# Altium PCB hdmii_m2m_jumper_v5.PcbDoc
Units mm, origin at the board's own origin, x right, y up, seen from the top; angles counter-clockwise.
Board outline 24.73 x 35.28 mm, 4 copper layers (L1, L2, L3, L4), stack 1.559 mm thick; 6 components, 14 nets, 50 pads, 111 vias.
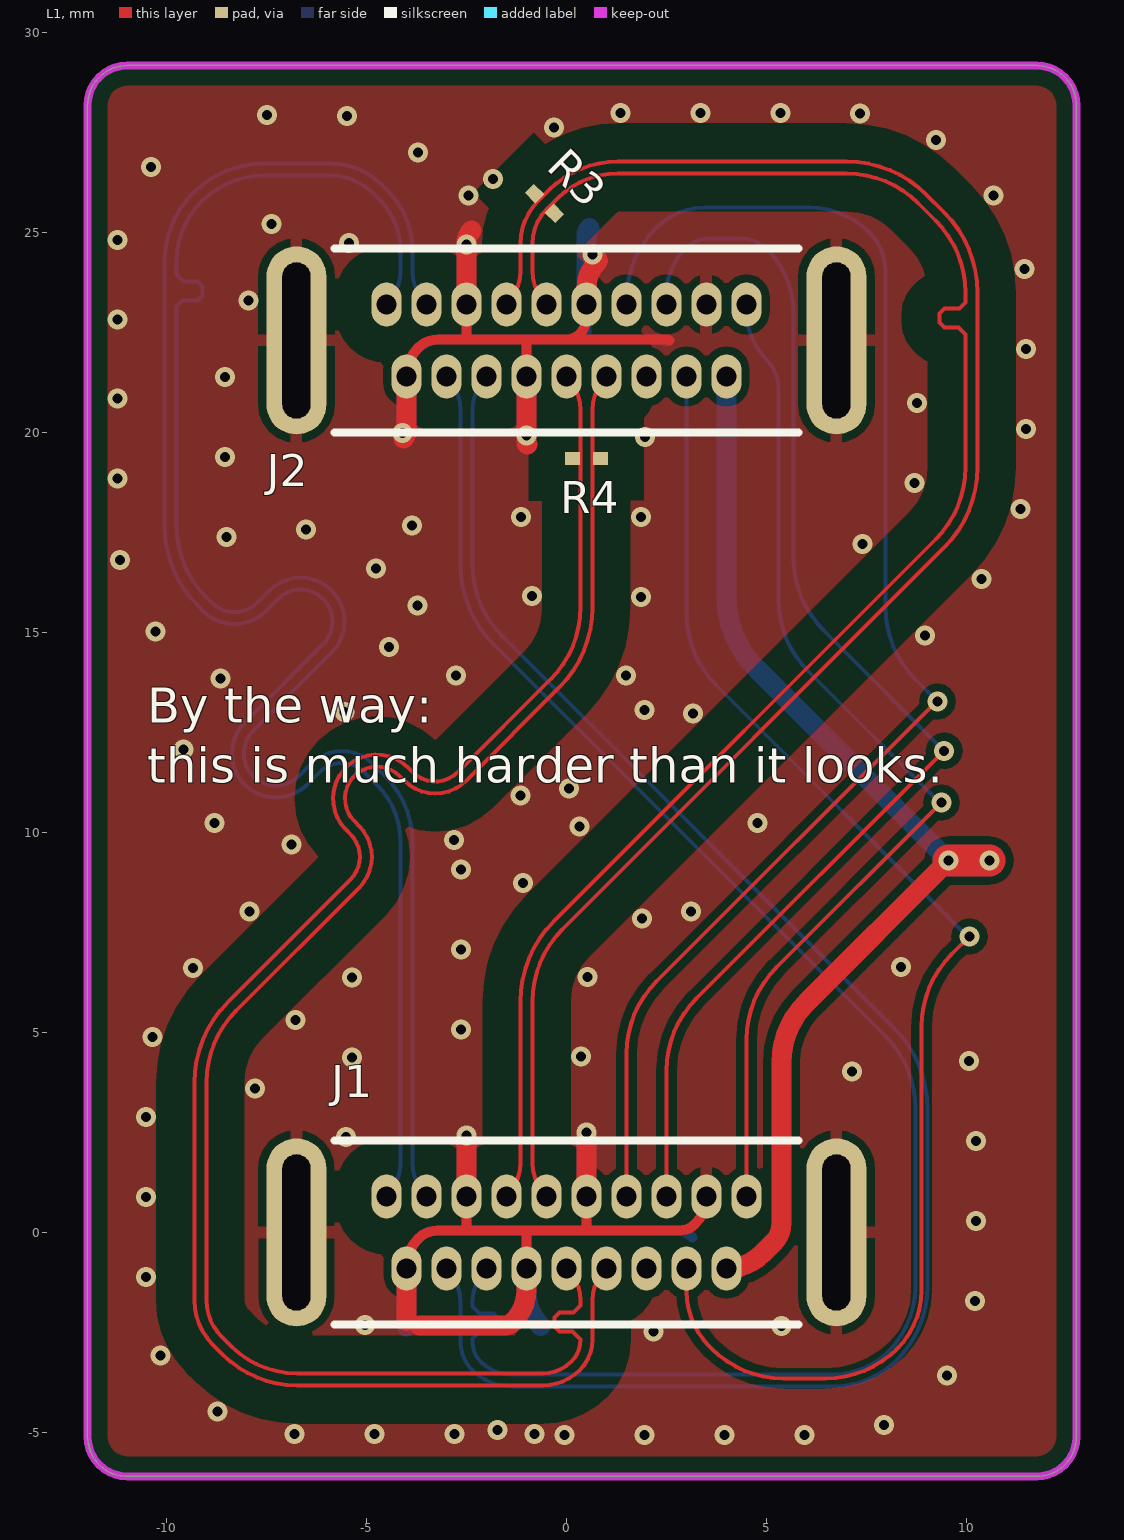
[diagram p0: L1 view]
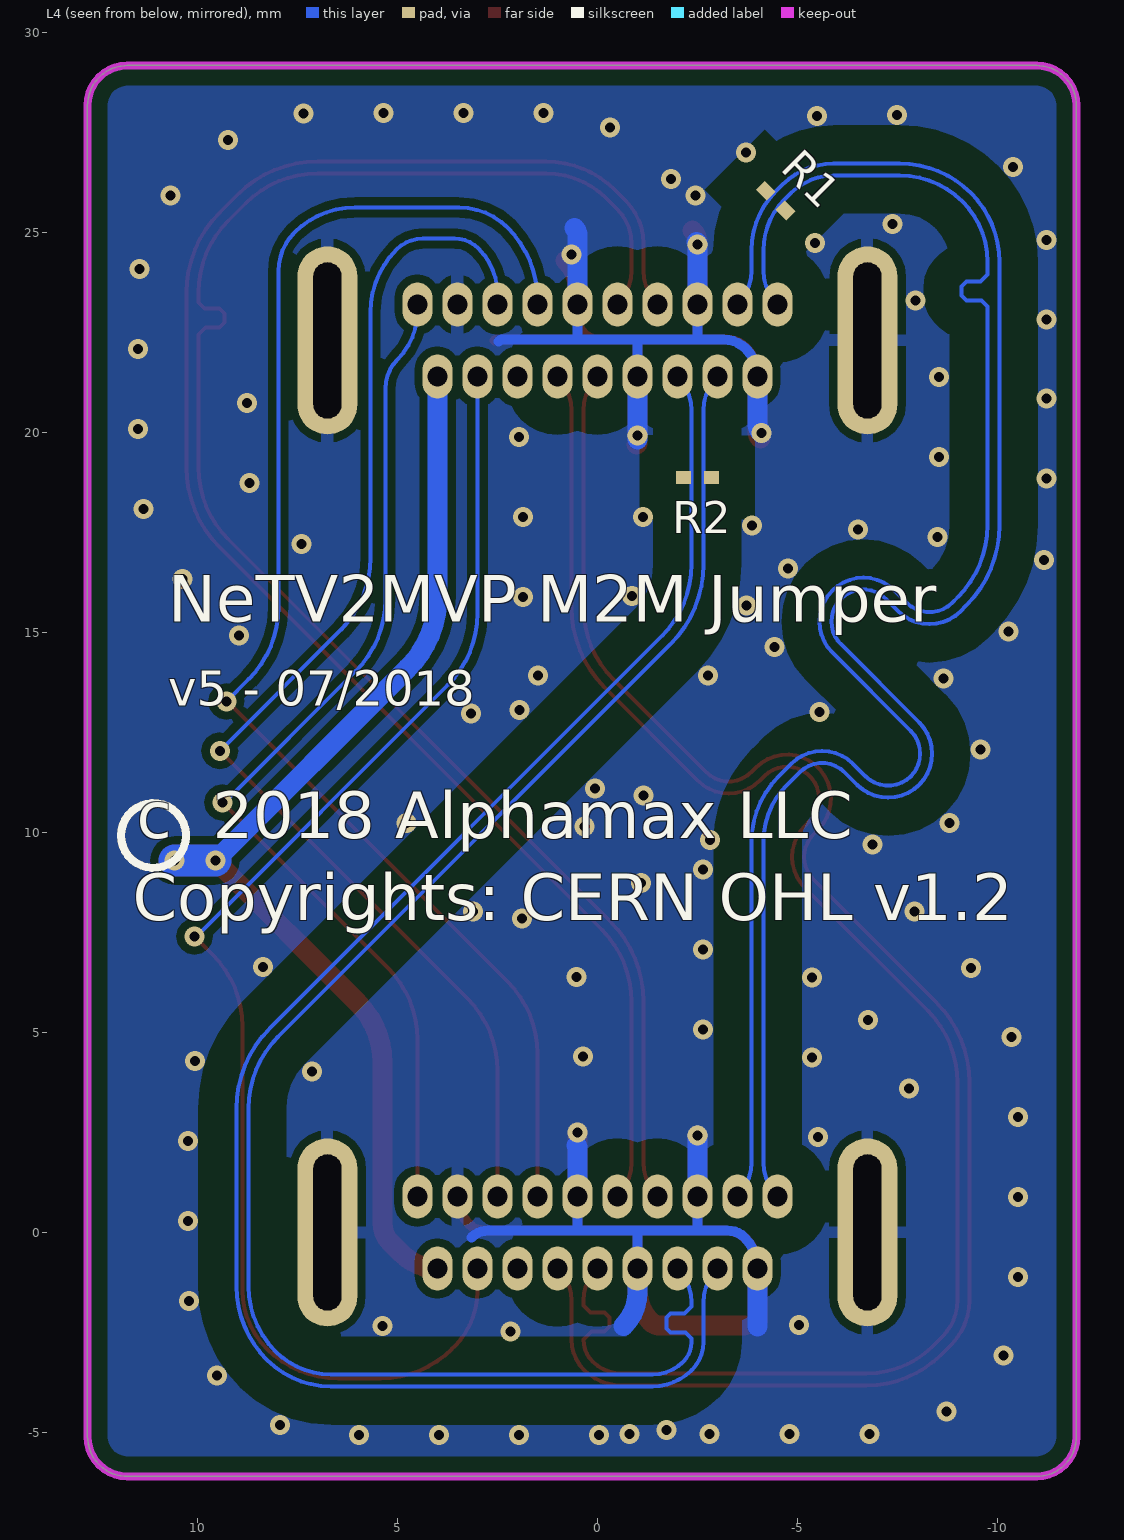
[diagram p1: L4 view, seen from below]
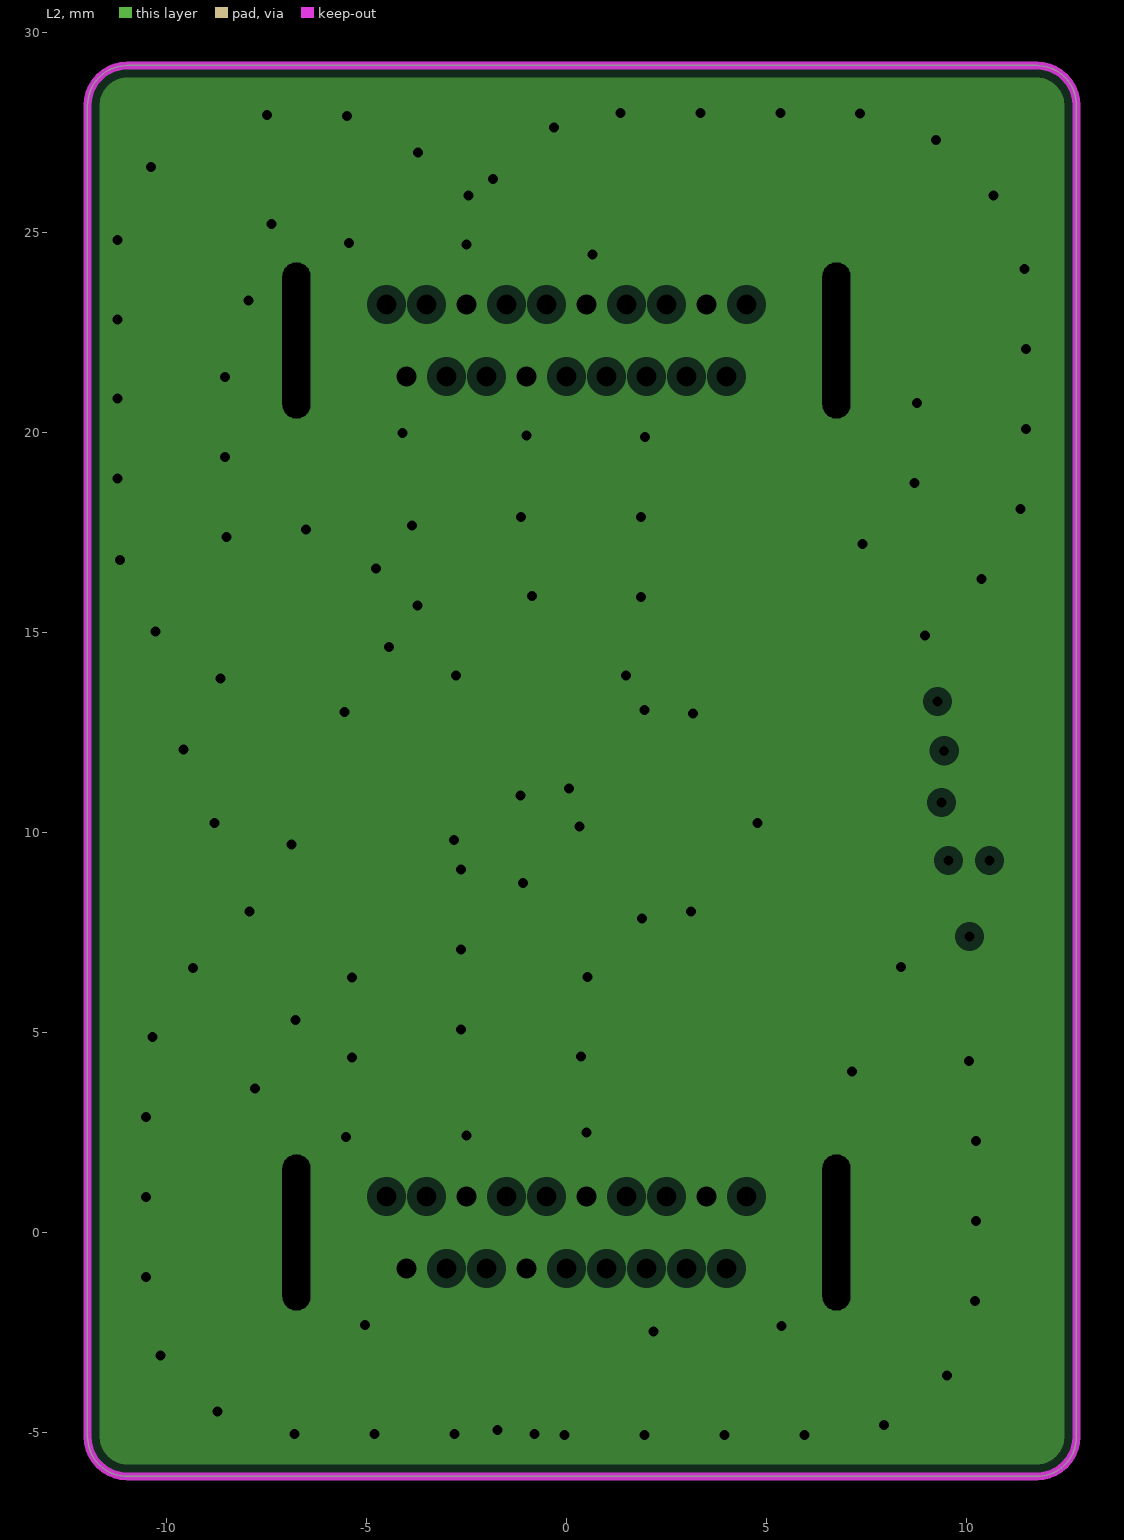
[diagram p2: L2, clearances drawn from the general rule]
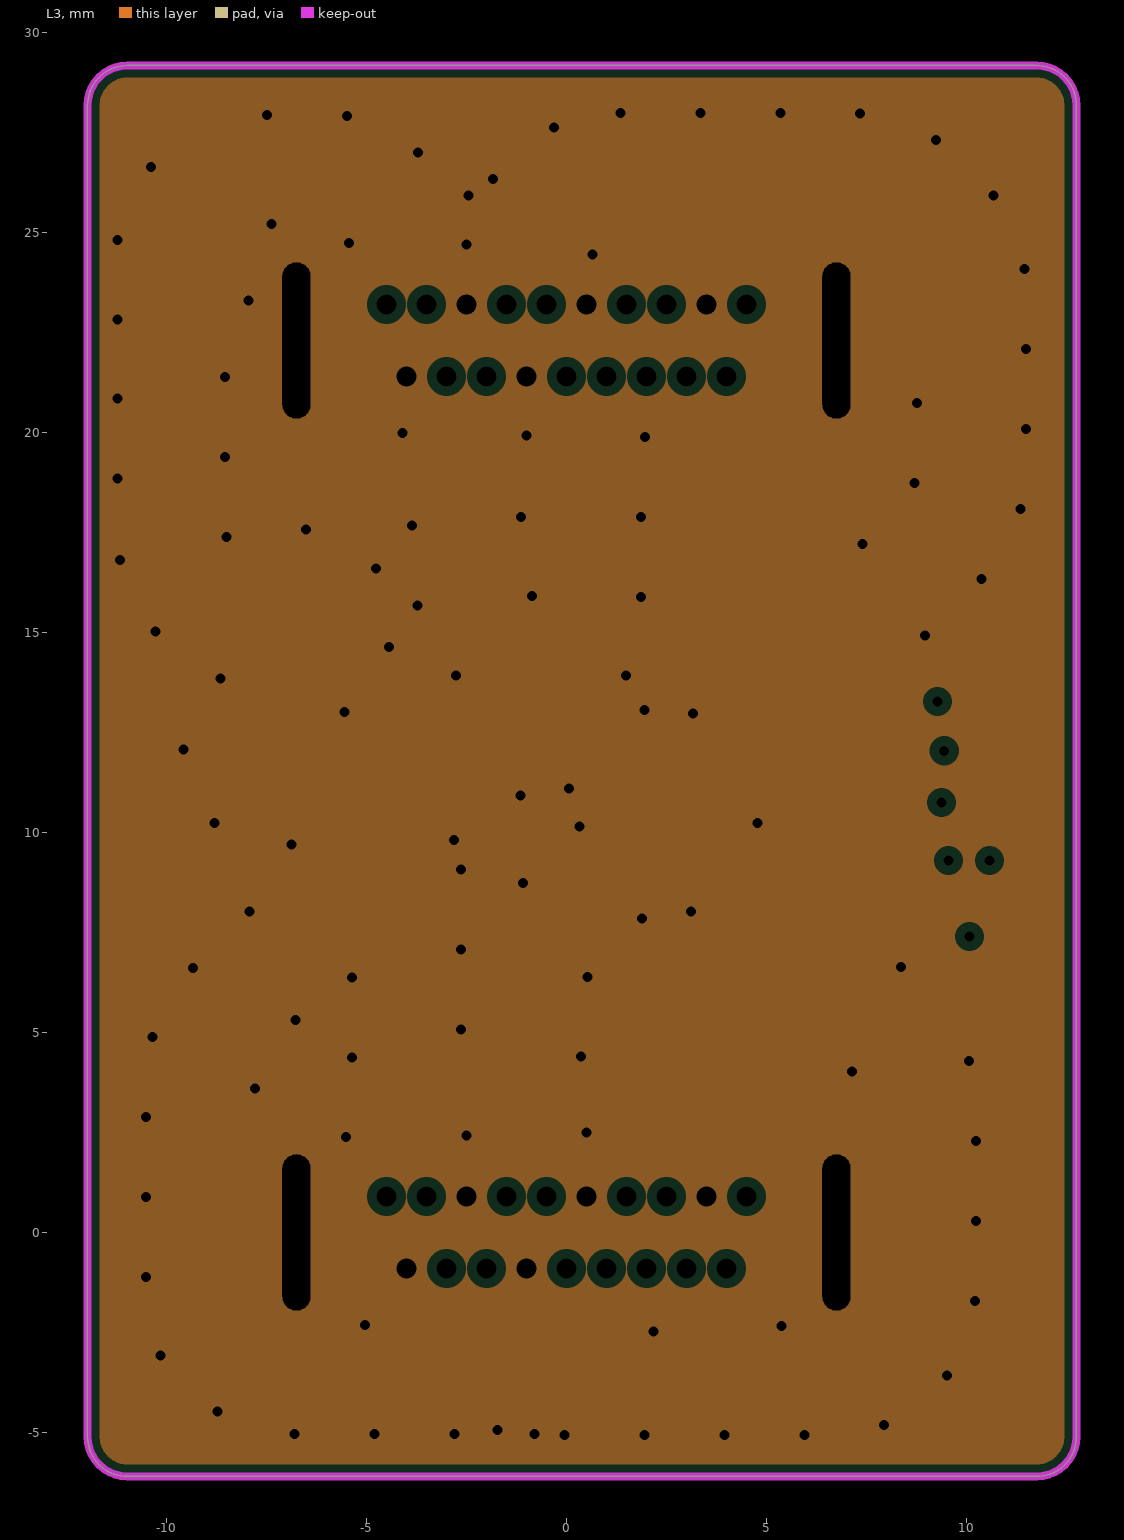
[diagram p3: L3, clearances drawn from the general rule]

## Layer stack, top to bottom
TopSolder: solder mask 0.0102, Solder Resist, Dk 3.6
L1: signal copper 0.0356
Dielectric1: core 0.0762, FR-4, Dk 3.9
L2: plane copper 0.0178, net GND
Dielectric4: prepreg 1.3, FR-4, Dk 4.4
L3: plane copper 0.0178, net GND
Dielectric5: core 0.0762, FR-4, Dk 4.2
L4: signal copper 0.0356
BottomSolder: solder mask 0.0102, Solder Resist, Dk 3.6

## Board outline
-11.975,-5.1 ccw(c-10.975,-5.1) -10.975,-6.1 11.75,-6.1 ccw(c11.75,-5.1) 12.75,-5.1 12.75,28.175 ccw(c11.75,28.175) 11.75,29.175 -10.975,29.175 ccw(c-10.975,28.175) -11.975,28.175

## Design rules (kind name [scope] priority, off if disabled: settings)
BoardOutlineClearance [All] p1: gap=0.5 ignorepadtopadclearanceinfootprint=FALSE except(0: Arc-SplitContinuation Track-SplitContinuation SMDPad-SplitContinuation THPad-SplitContinuation Via-SplitContinuation Fill-SplitContinuation Poly-SplitContinuation Region-SplitContinuation Text-SplitContinuation)
Clearance Clearance_poly_Z [InPolygon vs InNetClass('B0_SE40') OR InNetClass('B1_SE40') OR InNetClass('B2_SE40') OR InNetClass('B3_SE40') OR InNetClass('SE40') OR InNetClass('SE45_HAX')] p1: gap=0.7 ignorepadtopadclearanceinfootprint=FALSE // polygon to impedance controlled line
Clearance Clearance_poly_diff [InPolygon vs (InDifferentialPairClass('All Differential Pairs'))] p2: gap=0.9 ignorepadtopadclearanceinfootprint=FALSE // Polygon to diff pair rule
Clearance "Basic Clearance_SE_Z" [(InNetClass('B0_SE40') OR InNetClass('B1_SE40') OR InNetClass('B2_SE40') OR InNetClass('B3_SE40') OR InNetClass('SE40') OR InNetClass('SE45_HAX'))] p3: gap=0.09 ignorepadtopadclearanceinfootprint=FALSE // basic clearance rule
Clearance Clearance_NPTH [PadIsPlated = 'False'] p4: gap=0.3 ignorepadtopadclearanceinfootprint=FALSE
Clearance "Clearance_Edge Connector" [(InComponentClass('Edge Connector')) vs (InComponentClass('Edge Connector'))] p5: gap=0.2 ignorepadtopadclearanceinfootprint=FALSE except(0: Arc-Hole Track-Hole SMDPad-Hole THPad-Hole Via-Hole Fill-Hole Poly-Hole Region-Hole Text-Hole)
Clearance "Basic Clearance" [All] p6: gap=0.1 ignorepadtopadclearanceinfootprint=FALSE except(0.2: Arc-Poly Arc-Region Arc-Hole Track-Poly Track-Region Track-Hole SMDPad-Poly SMDPad-Region SMDPad-Hole THPad-Poly THPad-Region THPad-Hole Via-Poly Via-Region Via-Hole Fill-Poly Fill-Region Fill-Hole Poly-Poly Poly-Region Poly-Hole Region-Region Region-Hole Text-Hole) // basic clearance rule
Clearance Clearance_internal_plane [InPolygon] p7: gap=0.2 ignorepadtopadclearanceinfootprint=FALSE
ComponentClearance [All] p1 off: gap=0.254 collisioncheckmode=3 verticalgap=0.254 showdistances=FALSE
DiffPairsRouting DiffPairsRouting_PCIE [InDifferentialPairClass('PCIE')] p1: maxlimit=0.2 minlimit=0.14 mostfreqgap=0.14 toplayer_minwidth=0.1 toplayer_maxwidth=0.15 toplayer_prefwidth=0.13 bottomlayer_minwidth=0.1 bottomlayer_maxwidth=0.15 bottomlayer_prefwidth=0.13 maxuncoupledlength=12
DiffPairsRouting DiffPairsRouting_100DP [(InNetClass('HDMI_CNR') OR InNetClass('HDMI_TX'))] p2: maxlimit=0.25 minlimit=0.1 mostfreqgap=0.2 toplayer_minwidth=0.099 toplayer_maxwidth=0.18 toplayer_prefwidth=0.099 bottomlayer_minwidth=0.099 bottomlayer_maxwidth=0.18 bottomlayer_prefwidth=0.099 maxuncoupledlength=6 // 100 ohm DP rule
DiffPairsRouting DiffPairsRouting_90DP [InDifferentialPair('USB_D') OR InDifferentialPairClass('HAX_DP') OR InDifferentialPairClass('PCI_DP') OR InDifferentialPairClass('USB')] p3: maxlimit=0.25 minlimit=0.13 mostfreqgap=0.13 toplayer_minwidth=0.111 toplayer_maxwidth=0.225 toplayer_prefwidth=0.111 bottomlayer_minwidth=0.111 bottomlayer_maxwidth=0.225 bottomlayer_prefwidth=0.111 maxuncoupledlength=6 // 90 ohm diff pair
DiffPairsRouting DiffPairsRouting_80DP [InDifferentialPair('DDR3_CK') OR InDifferentialPair('DDR3_DQS0') OR InDifferentialPair('DDR3_DQS1') OR InDifferentialPair('DDR3_DQS2') OR InDifferentialPair('DDR3_DQS3') OR InDifferentialPair('REFCLK')] p4: maxlimit=0.25 minlimit=0.1 mostfreqgap=0.14 toplayer_minwidth=0.1 toplayer_maxwidth=0.235 toplayer_prefwidth=0.13 bottomlayer_minwidth=0.1 bottomlayer_maxwidth=0.235 bottomlayer_prefwidth=0.13 maxuncoupledlength=6 // 80ohm DP rule
DiffPairsRouting DiffPairsRouting_generic [All] p5: maxlimit=0.25 minlimit=0.2 mostfreqgap=0.2 toplayer_minwidth=0 toplayer_maxwidth=0.18 toplayer_prefwidth=0.1 bottomlayer_minwidth=0 bottomlayer_maxwidth=0.18 bottomlayer_prefwidth=0.1 maxuncoupledlength=6 // basic diff pair rule
FabricationTestPointUsage TestPointUsage [All] p1: valid=0 allowmultiple=FALSE
FabricationTestpoint Testpoint [All] p1: side=3 testpointundercomponent=TRUE minsize=1.016 maxsize=2.54 preferedsize=1.524 minholesize=0.508 maxholesize=1.016 preferedholesize=0.813 testpointgrid=0.025 allowsidetop=TRUE allowsidebottom=TRUE usegrid=TRUE gridtolerance=0
HoleSize [All] p1: absolutevalues=TRUE maxlimit=4 minlimit=0.25 maxpercent=80.000 minpercent=20.000
HoleToHoleClearance [All] p1: gap=0.2 allowstackedmicrovias=TRUE
MatchedLengths MatchedLengths_HDMI [InDifferentialPairClass('HDMI')] p1: tolerance=0.2 checknetsindiffpair=FALSE checkdiffpairvsdiffpair=TRUE checkxsignals=TRUE checkothers=TRUE
MatchedLengths [InDifferentialPairClass('All Differential Pairs')] p2: tolerance=0.05 checknetsindiffpair=TRUE checkdiffpairvsdiffpair=FALSE checkxsignals=FALSE checkothers=FALSE
MinimumAnnularRing [All] p1: minimumring=0.05
MinimumSolderMaskSliver [All] p1: minsoldermaskwidth=0.07
PlaneClearance [All] p1: clearance=0.24
PlaneConnect [All] p1: planeconnectstyle=Direct reliefexpansion=0.508 reliefentries=4 reliefconductorwidth=0.254 reliefairgap=0.254
PolygonConnect [All] p1: thpad.connectstyle=Relief thpad.reliefconductorwidth=0.3 thpad.reliefentries=4 thpad.polygonreliefangle="90 Angle" thpad.airgapwidth=0.2 smdpad.connectstyle=Relief smdpad.reliefconductorwidth=0.2 smdpad.reliefentries=4 smdpad.polygonreliefangle="45 Angle" smdpad.airgapwidth=0.15 via.connectstyle=Direct via.reliefconductorwidth=0.25 via.reliefentries=4 via.polygonreliefangle="90 Angle" via.airgapwidth=0.15
RoomDefinition connectors [InComponentClass('connectors')] p1 off: confinementstyle=ConfineIn formatcopy=TRUE lockcomponents=FALSE outline -113.411,-56.642 -62.611,-56.642 -62.611,-31.242 -113.411,-31.242
RoutingTopology RoutingTopology_DDRAddressAndControls [InNetClass('DDR_AddressAndControls')] p1: topology=Daisy_Simple
RoutingTopology [All] p2: topology=Shortest
RoutingVias [All] p1: holewidth=0.25 width=0.5 viastyle="Through Hole" minholewidth=0.2 minwidth=0.45 maxholewidth=0.35 maxwidth=0.7
ShortCircuit ShortCircuit_mounting [InComponent('P10X') or InComponent('P11X') vs OnLayer('KeepOutLayer')] p1: allowed=TRUE
ShortCircuit [All] p2: allowed=FALSE
SilkToSilkClearance [All] p1 off: silktosilkclearance=0.254
SilkToSolderMaskClearance SilkscreenOverComponentPads [IsPad] p1 off: minsilkscreentomaskgap=0.254 clearancetoexposedcopper=TRUE
SolderMaskExpansion [All] p1: expansion=0.07
SupplyNets SupplyNets_3 [InNet('VTT')] p1: voltage=750.0m
SupplyNets SupplyNets_2 [InNet('P1.5V_IO')] p2: voltage=1.500
SupplyNets SupplyNets_1 [InNet('P1.5V_D')] p3: voltage=1.500
SupplyNets [InNet('P1.5V')] p4: voltage=1.500
Width Width_45SE [(InNetClass('B0_SE40') OR InNetClass('B1_SE40') OR InNetClass('B2_SE40') OR InNetClass('B3_SE40') OR InNetClass('SE40') OR InNetClass('SE45_HAX'))] p1: maxlimit=2 minlimit=0.11 preferedwidth=0.12 minimp=50.000000 maximp=50.000000 favimp=50.000000 // 45 ohm SE rule
Width Width_basic [All] p2: maxlimit=2 minlimit=0.097 preferedwidth=0.1 minimp=50.000000 maximp=50.000000 favimp=50.000000
17 further rules are at their usual default settings.

## Classes and differential pairs
net class HDMI_TX: CLK_N CLK_P TMDS0_N TMDS0_P TMDS1_N TMDS1_P TMDS2_N TMDS2_P
differential pair TMDS2: +TMDS2_P -TMDS2_N
differential pair TMDS1: +TMDS1_P -TMDS1_N
differential pair TMDS0: +TMDS0_P -TMDS0_N
differential pair CLK: +CLK_P -CLK_N

## Components (designator, comment, footprint, x,y, rotation, side; value= is the part's Value field where it differs from the comment)
J1 "KAWEEI CHDMI-AMSS-01-D" KAWEEI_CHDMI_AMSS-01-D 0,0 r180 top
J2 "KAWEEI CHDMI-AMSS-01-D" KAWEEI_CHDMI_AMSS-01-D 0,22.3 r180 top
R1 "820, 1%" CAPC0603X03L -4.453,25.797 r45 bottom
R2 "820, 1%" CAPC0603X03L -2.5,18.875 r180 bottom
R3 "820, 1%" CAPC0603X03L -0.55,25.725 r315 top
R4 "820, 1%" CAPC0603X03L 0.5,19.35 r180 top

## Footprints (in the part's own frame and the unit in brackets; to place one, negate y for a bottom-side part, rotate by r counter-clockwise, add the part's x,y. Pads: shape width x height; smd on the part's side, far side on the other; paste and mask are expansions set on the pad)
CAPC0603X03L [mm] "Chip Capacitor, 2-Leads, Body 0.60x0.30mm, IPC High Density"
  rect 0.38x0.32 smd mask+0.07: 1(-0.35,0) 2(0.35,0)
  body extent -0.3,-0.15 0.3,0.15, height 0.3
KAWEEI_CHDMI_AMSS-01-D [mm] "Vertical PCB mount HDMI male connector"
  oval 1.5x4.7 hole 0.7 slot 3.9 at 90 deg: 0(-6.75,0) 0(6.75,0)
  oval 0.75x1.1 hole 0.5 mask+0: 1(4.5,-0.9) 2(4,0.9) 3(3.5,-0.9) 4(3,0.9) 5(2.5,-0.9) 6(2,0.9) 7(1.5,-0.9) 8(1,0.9) 9(0.5,-0.9) 10(0,0.9) 11(-0.5,-0.9) 12(-1,0.9) 13(-1.5,-0.9) 14(-2,0.9) 15(-2.5,-0.9) 16(-3,0.9) 17(-3.5,-0.9) 18(-4,0.9) 19(-4.5,-0.9)
  silkscreen extent -5.8,-2.3 5.8,2.3, body extent -7,-2.3 7,2.3, height 12.8

## Part data
J1 J2: library part "Header 19", "Molex HDMI connector, Type A", MPN=CHDMI-AMSS-01-D, LatestRevisionDate=17-Jul-2002, LatestRevisionNote="Re-released for DXP Platform.", MYPN=J-CHDMI-AMSS-01-D, Publisher="Altium Limited", VENDOR=KAWEEI
R1 R2 R3 R4: library part Res1, "Resistor", MPN=ANY, MYPN=R-821-1P-1_16W-0201, VENDOR=ANY

## Via types
v1: diameter 0.5, hole 0.25, L1 to L4, tented both sides, 111 vias

## Nets (pads, with @x,y where several pads share a name; then routed paths per layer and width w, separated by ;. In a path a pad name is that pad's centre, name@x,y a point inside that pad or via, vN(x,y) a via of type N, cw(c..) or ccw(c..) an arc to the next point about the centre after c; other vN are vias at no path point)
CEC: J1.13 J2.13 | length 35.5
  L1 w0.1: J1.13 1.5,4.473 cw(c4.04,4.473) 2.244,6.269 9.232,13.257 cw(c9.275,13.215) v1(9.275,13.275)
  L4 w0.1: J2.13 1.5,23.323 cw(c4.04,23.323) 2.244,25.119 cw(c3.466,23.897) 3.466,25.625 6.066,25.625 cw(c6.066,23.491) 7.575,25 cw(c6.609,24.034) 7.975,24.034 7.975,15.627 ccw(c10.515,15.627) 8.719,13.831 v1(9.275,13.275)
CLK_N: J1.12 J2.10 R4.2 | length 43
  L1 w0.099: J2.10 cw(c-0.846,20.554) 0.351,20.554 0.351,15.628 cw(c-2.189,15.628) -0.393,13.832 -2.716,11.509 cw(c-3.281,12.074) -3.846,11.509 -3.961,11.624 ccw(c-4.738,10.847) -5.515,10.07 -5.4,9.956 cw(c-5.965,9.39) -5.166,9.39 cw(c-5.965,9.39) -5.4,8.825 -8.467,5.758 ccw(c-6.46,3.75) -9.299,3.75 -9.299,-1.695 ccw(c-7.72,-1.695) -8.836,-2.811 -8.601,-3.047 ccw(c-6.725,-1.171) -6.725,-3.824 -0.599,-3.824 ccw(c-0.599,-2.501) 0.336,-3.436 ccw(c-0.418,-2.682) 0.649,-2.682 0.649,-1.695 cw(c1.72,-1.695) 0.963,-0.937 J1.12
CLK_P: J1.10 J2.12 R4.1 | length 43
  L1 w0.099: J1.10 0.036,-0.936 cw(c-0.724,-1.695) 0.35,-1.695 0.35,-1.825 0.175,-2 -0.175,-2 -0.3,-2.125 -0.3,-2.35 -0.175,-2.475 0.15,-2.475 0.35,-2.675 0.35,-2.682 cw(c-0.418,-2.682) 0.125,-3.225 cw(c-0.599,-2.501) -0.599,-3.525 -6.725,-3.525 cw(c-6.725,-1.171) -8.389,-2.836 -8.625,-2.6 cw(c-7.72,-1.695) -9,-1.695 -9,3.75 cw(c-6.46,3.75) -8.256,5.546 -5.189,8.614 ccw(c-5.965,9.39) -4.867,9.39 ccw(c-5.965,9.39) -5.189,10.167 -5.303,10.282 cw(c-4.738,10.847) -4.172,11.412 -4.058,11.298 ccw(c-3.281,12.074) -2.504,11.298 -0.182,13.62 ccw(c-2.189,15.628) 0.65,15.628 0.65,20.554 cw(c1.846,20.554) J2.12
DDC_SCL: J1.15 J2.15 | length 31.8
  L1 w0.1: J1.15 2.5,4.048 cw(c5.04,4.048) 3.244,5.844 v1(9.442,12.042)
  L4 w0.1: J2.15 2.5,23.453 cw(c4.122,23.453) 2.975,24.6 cw(c3.579,23.996) 3.579,24.85 4.361,24.85 cw(c4.361,23.911) 5.025,24.575 cw(c3.456,23.006) 5.675,23.006 5.675,16.862 ccw(c8.215,16.862) 6.419,15.066 v1(9.442,12.042)
DDC_SDA: J1.16 J2.16 | length 34.9
  L1 w0.1: J1.16 3,-1.462 ccw(c4.963,-1.462) 3.575,-2.85 3.631,-2.906 ccw(c5.427,-1.11) 5.427,-3.65 6.473,-3.65 ccw(c6.473,-1.11) 8.269,-2.906 ccw(c6.806,-1.443) 8.875,-1.443 8.875,5.148 cw(c11.415,5.148) 9.619,6.944 v1(10.075,7.4)
  L4 w0.1: J2.16 3,15.477 ccw(c5.54,15.477) 3.744,13.681 v1@10.05,7.375
GND: J1.0 J1.2 J1.5 J1.8 J1.11 J1.17 J2.0 J2.2 J2.5 J2.8 J2.11 J2.17 | length 68.3
  L1 w0.25: J1.2 -4,-0.874 cw(c-2.976,-0.874) -3.7,-0.15 cw(c-3.217,-0.633) -3.217,0.05 -1,0.05 ; J2.2 cw(c-2.974,21.4) -3.699,22.126 cw(c-3.218,21.644) -3.218,22.325 -2.5,22.325 ; -2.5,0.054 J1.5 ; J2.5 -2.5,22.325 ; J1.8 -1,0.05 ; J2.8 -1,22.325 ; J1.11 0.5,0.11 ccw(c0.585,0.11) 0.525,0.05 ; J2.11 0.5,22.876 cw(c-0.081,22.876) 0.33,22.465 cw(c-0.008,22.802) -0.008,22.325 ; 2.575,22.3 ccw(c2.515,22.24) 2.515,22.325 -0.008,22.325 ; J1.17 cw(c2.534,0.9) 3.217,0.217 3.2,0.2 cw(c2.838,0.562) 2.838,0.05 0.525,0.05 ; -2.5,22.325 -1,22.325 ; -1,0.05 0.525,0.05 ; -1,22.325 -0.008,22.325
  L1 w0.5: v1@-4.075,19.85 ccw(c-4.256,20.031) -4,20.031 J2.2 ; -4,-2.212 J1.2 ; -3.675,-2.323 -1.562,-2.323 ccw(c-1.562,-1.988) -1.325,-2.225 ccw(c-2.11,-1.44) -1,-1.44 J1.8 ; J1.5 v1(-2.5,2.425) ; J2.5 v1(-2.5,24.697) -2.5,24.748 cw(c-2.073,24.748) -2.375,25.05 ; J2.8 v1(-1,19.925) -1,19.747 ccw(c-0.933,19.747) v1@-0.98,19.7 ; J1.11 v1(0.5,2.494) ; J2.11 0.5,23.591 cw(c1.503,23.591) v1@0.794,24.3
  L4 w0.25: J1.2 cw(c-2.914,-0.9) -3.682,-0.132 cw(c-3.243,-0.571) -3.243,0.05 -2.5,0.05 ; J2.2 cw(c-3.022,21.4) -3.714,22.091 cw(c-3.149,21.527) -3.149,22.325 -1,22.325 ; J1.5 -2.5,0.05 ; -2.5,22.33 J2.5 ; J1.8 -1,-0.01 ccw(c-1.085,-0.01) -1.025,0.05 ; J2.8 -1,22.325 ; 0.5,0.06 J1.11 ; J2.11 0.5,22.325 ; 2.475,22.275 ccw(c2.354,22.154) 2.354,22.325 0.5,22.325 ; 3.15,-0.125 ccw(c2.728,-0.547) 2.728,0.05 -1.025,0.05 ; -2.5,0.05 -1.025,0.05 ; -1,22.325 0.5,22.325
  L4 w0.5: v1(-4.1,19.984) ccw(c-4.341,20.226) -4,20.226 J2.2 ; -4,-2.35 J1.2 ; J1.5 v1(-2.5,2.425) ; J2.5 v1(-2.5,24.697) cw(c-2.415,24.697) v1@-2.475,24.757 ; J1.8 -1,-1.492 ccw(c0.195,-1.492) -0.65,-2.336 ; v1@-1,19.826 v1(-1,19.925) J2.8 ; J1.11 0.5,2.115 cw(c0.585,2.115) 0.525,2.175 ; J2.11 0.5,24.928 cw(c0.756,24.928) 0.575,25.11
  other v1: -0.044,-5.063 1.956,-5.063 3.956,-5.063 5.956,-5.063 -6.801,-5.037 -4.801,-5.037 -2.801,-5.037 -0.801,-5.037 -1.725,-4.937 7.941,-4.818 -8.721,-4.478 9.511,-3.579 -10.145,-3.074 2.175,-2.475 5.372,-2.336 -5.039,-2.311 10.217,-1.708 -10.512,-1.108 10.238,0.292 -10.512,0.892 10.238,2.292 -5.508,2.385 -10.512,2.892 -7.786,3.596 7.135,4.02 10.062,4.284 -5.364,4.38 0.364,4.4 -10.351,4.886 -2.637,5.077 -6.768,5.318 -5.364,6.38 0.526,6.393 -9.336,6.609 8.365,6.634 -2.637,7.077 1.893,7.854 -7.92,8.021 3.115,8.025 -1.084,8.732 -2.637,9.077 -6.871,9.695 -2.812,9.811 0.33,10.146 -8.796,10.236 4.78,10.236 -1.155,10.931 0.067,11.094 -9.575,12.078 3.158,12.974 -5.546,13.01 1.952,13.064 -8.654,13.853 -2.761,13.923 1.487,13.924 -4.431,14.633 8.964,14.925 -10.272,15.029 -3.727,15.674 -0.862,15.907 1.863,15.888 10.378,16.339 -4.762,16.605 -11.167,16.817 7.401,17.217 -8.499,17.385 -6.508,17.58 -3.863,17.669 -1.137,17.888 1.863,17.888 11.349,18.087 8.695,18.742 -11.225,18.85 -8.536,19.385 1.966,19.885 11.488,20.083 8.761,20.741 -11.225,20.85 -8.537,21.385 11.488,22.083 -11.225,22.825 -7.95,23.3 11.445,24.082 0.65,24.449 -5.434,24.743 -11.222,24.814 -7.378,25.211 -2.45,25.921 10.677,25.929 -1.838,26.332 -10.387,26.632 -3.711,27 9.234,27.313 -0.308,27.62 -5.493,27.908 -7.492,27.938 7.344,27.969 1.344,27.988 3.344,27.988 5.344,27.988
HPD: J1.19 J2.19 | length 26
  L1 w0.1: J1.19 4.5,4.823 cw(c7.04,4.823) 5.244,6.619 v1(9.375,10.75)
  L4 w0.1: J2.19 4.5,23.032 ccw(c6.207,23.032) 5,21.825 cw(c4.276,21.101) 5.3,21.101 5.3,15.827 ccw(c7.84,15.827) 6.044,14.031 v1@9.35,10.725
P5V: J1.18 J2.18 | length 29
  L1 w0.5: J1.18 ccw(c4,0.367) 4.896,-0.529 5.181,-0.244 ccw(c4.711,0.225) 5.375,0.225 5.375,4.248 cw(c7.493,4.248) 5.995,5.745 v1(9.55,9.3)
  L1 w0.8: v1(9.55,9.3) v1(10.575,9.3)
  L4 w0.5: J2.18 4,15.902 ccw(c6.54,15.902) 4.744,14.106 v1(9.55,9.3)
  L4 w0.8: v1(9.55,9.3) v1(10.575,9.3)
TMDS0_N: J1.9 J2.7 R3.1 | length 43
  L1 w0.099: J2.7 ccw(c-2.346,24.046) -1.149,24.046 -1.149,24.725 cw(c0.355,24.725) -0.709,25.789 -0.436,26.061 cw(c1.284,24.341) 1.284,26.774 6.998,26.774 cw(c6.998,23.935) 9.005,25.942 9.442,25.505 cw(c7.435,23.498) 10.274,23.498 10.274,23.251 10.274,22.45 10.274,19.127 cw(c7.435,19.127) 9.442,17.12 -0.106,7.571 ccw(c1.69,5.775) -0.85,5.775 -0.85,1.745 ccw(c0.345,1.745) J1.9
TMDS0_P: J1.7 J2.9 R3.2 | length 43
  L1 w0.099: J1.7 ccw(c-2.347,1.747) -1.149,1.747 -1.149,5.775 cw(c1.69,5.775) -0.317,7.783 9.231,17.331 ccw(c7.435,19.127) 9.975,19.127 9.975,22.45 9.8,22.625 ; J2.9 cw(c0.346,24.046) -0.85,24.046 -0.85,24.725 cw(c0.355,24.725) -0.497,25.578 -0.225,25.85 cw(c1.284,24.341) 1.284,26.475 6.998,26.475 cw(c6.998,23.935) 8.794,25.731 9.231,25.294 cw(c7.435,23.498) 9.975,23.498 9.975,23.251 9.825,23.101 9.449,23.101 9.324,22.976 9.324,22.751 9.449,22.626 9.775,22.626
TMDS1_N: J1.6 J2.4 R2.2 | length 43
  L4 w0.099: J2.4 cw(c-3.846,20.554) -2.649,20.554 -2.649,16.703 ccw(c0.189,16.703) -1.818,14.695 7.981,4.896 cw(c6.185,3.1) 8.725,3.1 8.725,-1.345 cw(c6.42,-1.345) 8.05,-2.975 cw(c6.662,-1.587) 6.662,-3.55 -1.375,-3.55 cw(c-1.375,-2.464) -2.143,-3.232 -2.15,-3.225 cw(c-1.667,-2.742) -2.35,-2.742 -2.35,-2.651 -2.2,-2.501 -1.824,-2.501 -1.725,-2.402 -1.725,-2.125 -1.824,-2.026 -2.174,-2.026 -2.2,-2 -2.35,-1.85 -2.35,-1.745 cw(c-1.155,-1.745) J1.6
TMDS1_P: J1.4 J2.6 R2.1 | length 43
  L4 w0.099: J1.4 cw(c-3.847,-1.747) -2.649,-1.747 -2.649,-2.742 ccw(c-1.667,-2.742) -2.361,-3.436 -2.355,-3.443 ccw(c-1.375,-2.464) -1.375,-3.849 6.662,-3.849 ccw(c6.662,-1.587) 8.261,-3.186 ccw(c6.42,-1.345) 9.024,-1.345 9.024,3.1 ccw(c6.185,3.1) 8.192,5.108 -1.607,14.907 cw(c0.189,16.703) -2.351,16.703 -2.351,20.554 cw(c-1.154,20.554) J2.6
TMDS2_N: J1.3 J2.1 R1.1 | length 42.9
  L4 w0.099: J2.1 ccw(c-5.346,24.046) -4.149,24.046 -4.149,24.556 ccw(c-5.944,24.556) -4.675,25.825 -4.833,25.983 ccw(c-5.9,24.916) -5.9,26.425 -7.556,26.425 ccw(c-7.556,24.206) -9.125,25.775 ccw(c-7.616,24.266) -9.75,24.266 -9.75,23.951 -9.574,23.775 -9.224,23.775 -9.099,23.65 -9.099,23.425 -9.224,23.3 -9.6,23.3 -9.75,23.15 -9.75,17.677 ccw(c-7.21,17.677) -9.006,15.881 -8.865,15.74 ccw(c-8.3,16.306) -7.735,15.74 -7.426,16.049 cw(c-6.649,15.273) -5.872,16.049 cw(c-6.649,15.273) -5.55,15.273 cw(c-6.649,15.273) -5.872,14.496 -7.832,12.536 ccw(c-7.267,11.97) -7.832,11.405 ccw(c-7.267,11.97) -6.702,11.405 -6.393,11.714 cw(c-5.616,10.937) -4.839,11.714 -4.525,11.4 cw(c-6.152,9.773) -3.851,9.773 -3.851,1.747 ccw(c-2.653,1.747) J1.3
TMDS2_P: J1.1 J2.3 R1.2 | length 42.9
  L4 w0.099: J1.1 ccw(c-5.345,1.745) -4.15,1.745 -4.15,9.773 ccw(c-6.152,9.773) -4.736,11.189 -5.051,11.503 ccw(c-5.616,10.937) -6.181,11.503 -6.49,11.194 cw(c-7.267,11.97) -8.044,11.194 cw(c-7.267,11.97) -8.044,12.747 -6.084,14.707 ccw(c-6.649,15.273) -5.849,15.273 ccw(c-6.649,15.273) -6.084,15.838 ccw(c-6.649,15.273) -7.214,15.838 -7.523,15.529 cw(c-8.3,16.306) -9.077,15.529 -9.217,15.67 cw(c-7.21,17.677) -10.049,17.677 -10.049,24.266 cw(c-7.616,24.266) -9.336,25.986 cw(c-7.556,24.206) -7.556,26.724 -5.9,26.724 cw(c-5.9,24.916) -4.622,26.194 -4.464,26.036 cw(c-5.944,24.556) -3.851,24.556 -3.851,24.046 ccw(c-2.654,24.046) J2.3
pads on no net: J1.14 J2.14

## Polygon pours and split planes (outlines as drawn)
GND on L1 "L1-GND" (solid, remove dead copper, pour order 24): -12.85,-6.9 11.773,-6.9 ccw(c11.773,-4.36) 13.569,-6.156 13.725,-6 13.725,27.985 ccw(c11.335,27.985) 13.025,29.675 ccw(c11.637,28.287) 11.637,30.25 -10.248,30.25 ccw(c-10.248,27.71) -12.044,29.506 -12.481,29.069 ccw(c-10.685,27.273) -13.225,27.273 -13.225,-5.839 ccw(c-11.689,-5.839) -12.775,-6.925
GND on L4 "L4-GND" (solid, remove dead copper, pour order 26): 0.5,30.35 -10.348,30.35 ccw(c-10.348,27.81) -12.144,29.606 -12.7,29.05 ccw(c-11.855,28.205) -13.05,28.205 -13.05,-4.873 ccw(c-10.51,-4.873) -12.306,-6.669 -12.075,-6.9 11.912,-6.9 ccw(c11.912,-4.937) 13.3,-6.325 13.331,-6.294 ccw(c11.535,-4.498) 14.075,-4.498 14.075,27.648 ccw(c11.535,27.648) 13.331,29.444 12.775,30 ccw(c11.87,29.095) 11.87,30.375 1.025,30.375
GND on L2 (split plane): 11.859,28.866 11.966,28.84 12.068,28.798 12.161,28.741 12.245,28.67 12.316,28.586 12.373,28.493 12.415,28.391 12.441,28.284 12.449,28.181 12.449,28.175 12.449,-5.1 12.449,-5.106 12.441,-5.209 12.415,-5.316 12.373,-5.418 12.316,-5.511 12.245,-5.595 12.161,-5.666 12.068,-5.723 11.966,-5.765 11.859,-5.791 11.756,-5.799 11.75,-5.799 -10.975,-5.799 -10.981,-5.799 -11.084,-5.791 -11.191,-5.765 -11.293,-5.723 -11.386,-5.666 -11.47,-5.595 -11.541,-5.511 -11.598,-5.418 -11.64,-5.316 -11.666,-5.209 -11.674,-5.106 -11.674,-5.1 -11.674,28.175 -11.674,28.181 -11.666,28.284 -11.64,28.391 -11.598,28.493 -11.541,28.586 -11.47,28.67 -11.386,28.741 -11.293,28.798 -11.191,28.84 -11.084,28.866 -10.981,28.874 -10.975,28.874 11.75,28.874 11.756,28.874
GND on L3 (split plane): 11.859,28.866 11.966,28.84 12.068,28.798 12.161,28.741 12.245,28.67 12.316,28.586 12.373,28.493 12.415,28.391 12.441,28.284 12.449,28.181 12.449,28.175 12.449,-5.1 12.449,-5.106 12.441,-5.209 12.415,-5.316 12.373,-5.418 12.316,-5.511 12.245,-5.595 12.161,-5.666 12.068,-5.723 11.966,-5.765 11.859,-5.791 11.756,-5.799 11.75,-5.799 -10.975,-5.799 -10.981,-5.799 -11.084,-5.791 -11.191,-5.765 -11.293,-5.723 -11.386,-5.666 -11.47,-5.595 -11.541,-5.511 -11.598,-5.418 -11.64,-5.316 -11.666,-5.209 -11.674,-5.106 -11.674,-5.1 -11.674,28.175 -11.674,28.181 -11.666,28.284 -11.64,28.391 -11.598,28.493 -11.541,28.586 -11.47,28.67 -11.386,28.741 -11.293,28.798 -11.191,28.84 -11.084,28.866 -10.981,28.874 -10.975,28.874 11.75,28.874 11.756,28.874

## Keep-outs
Keep-Out Layer:
  the board outline again, w0.2

## Silkscreen, mask and mechanical layers (free items; w line width, h text height)
TopOverlay:
  text "By the way: / this is much harder than it looks." at -10.475,10.95 h1.5
BottomOverlay:
  circle w0.2: c11.1,9.925 r0.811
  text "NeTV2MVP M2M Jumper" at 10.725,14.875 h2
  text "v5 - 07/2018" at 10.725,12.875 h1.5
  text "c  2018 Alphamax LLC" at 11.512,9.466 h2
  text "Copyrights: CERN OHL v1.2" at 11.612,7.416 h2
TopSolder:
  rectangle: -11.975,25.75 -8.475,29.25
BottomSolder:
  rectangle: 9,25.885 12.5,28.885
Mechanical 3:
  drawing of 274 lines, arcs and shapes, not listed
  text "Finish: HASL" at -1.3,57.8 h1
  text "Silk: white" at -1.3,55.6 h1
  text "Soldermask: green" at -1.3,53.8 h1
  text "Layer Stack" at -17.75,53.75 h1
  text "Layer" at -18.439,51.3 h0.8
  text "Name" at -13,51.3 h0.8
  text "Material" at -1.43,51.3 h0.8
  text "Thickness" at 10.007,51.3 h0.8
  text "Constant" at 18.645,51.3 h0.8
  text "4-layer rigid" at 26.216,51.3 h0.8
  text "1" at -18.439,49.7 h0.8
  text "TopOverlay" at -13,49.7 h0.8
  text "2" at -18.439,48.1 h0.8
  text "TopSolder" at -13,48.1 h0.8
  text "Solder Resist" at -1.43,48.1 h0.8
  text "0.010mm" at 10.007,48.1 h0.8
  text "3.6" at 18.645,48.1 h0.8
  text "Can reduce L1/L4 thickness to 0.7mil / for impedance control purpose" at -55.25,46.5 h1
  text "3" at -18.439,46.5 h0.8
  text "L1" at -13,46.5 h0.8
  text "Copper" at -1.43,46.5 h0.8
  text "0.036mm" at 10.007,46.5 h0.8
  text "4" at -18.439,44.9 h0.8
  text "Dielectric1" at -13,44.9 h0.8
  text "FR-4" at -1.43,44.9 h0.8
  text "0.076mm" at 10.007,44.9 h0.8
  text "3.9" at 18.645,44.9 h0.8
  text "5" at -18.439,43.3 h0.8
  text "L2" at -13,43.3 h0.8
  text "Copper" at -1.43,43.3 h0.8
  text "0.018mm" at 10.007,43.3 h0.8
  text "6" at -18.439,41.7 h0.8
  text "Dielectric4" at -13,41.7 h0.8
  text "FR-4" at -1.43,41.7 h0.8
  text "1.300mm" at 10.007,41.7 h0.8
  text "4.4" at 18.645,41.7 h0.8
  text "7" at -18.439,40.1 h0.8
  text "L3" at -13,40.1 h0.8
  text "Copper" at -1.43,40.1 h0.8
  text "0.018mm" at 10.007,40.1 h0.8
  text "8" at -18.439,38.5 h0.8
  text "Dielectric5" at -13,38.5 h0.8
  text "FR-4" at -1.43,38.5 h0.8
  text "0.076mm" at 10.007,38.5 h0.8
  text "4.2" at 18.645,38.5 h0.8
  text "9" at -18.439,36.9 h0.8
  text "L4" at -13,36.9 h0.8
  text "Copper" at -1.43,36.9 h0.8
  text "0.036mm" at 10.007,36.9 h0.8
  text "10" at -18.439,35.3 h0.8
  text "BottomSolder" at -13,35.3 h0.8
  text "Solder Resist" at -1.43,35.3 h0.8
  text "0.010mm" at 10.007,35.3 h0.8
  text "3.6" at 18.645,35.3 h0.8
  text "11" at -18.439,33.7 h0.8
  text "BottomOverlay" at -13,33.7 h0.8
  text "Thickness: 1.6mm +/-10%" at -54.75,33.25 h1
  text "Vertical clearance drawing" at 23.25,27.75 h1
  text "PCB (1.6mm)" at 27.5,19 h1
  text "All differential pairs: 100 ohm differential, top and bottom layers, +/-10% Please adjust trace size/thickness to target impedance." at -45.75,13.804 h1.5
  text "22.3mm nom" at 44.225,6.95 h1
  text "21.2mm standoff height" at 39.75,-2.5 h1 r90
  text "PCB (1.6mm)" at 27.5,-5 h1